# Altium PCB PCB_mezzanine_clock_template.PcbDoc
Units mm, origin at the board's own origin, x right, y up, seen from the top; angles counter-clockwise.
Board outline 43 x 80 mm, 4 copper layers (Component Side, Ground Plane, Power Plane, Solder Side), stack 1.013 mm thick; 81 components, 72 nets, 285 pads, 661 vias.
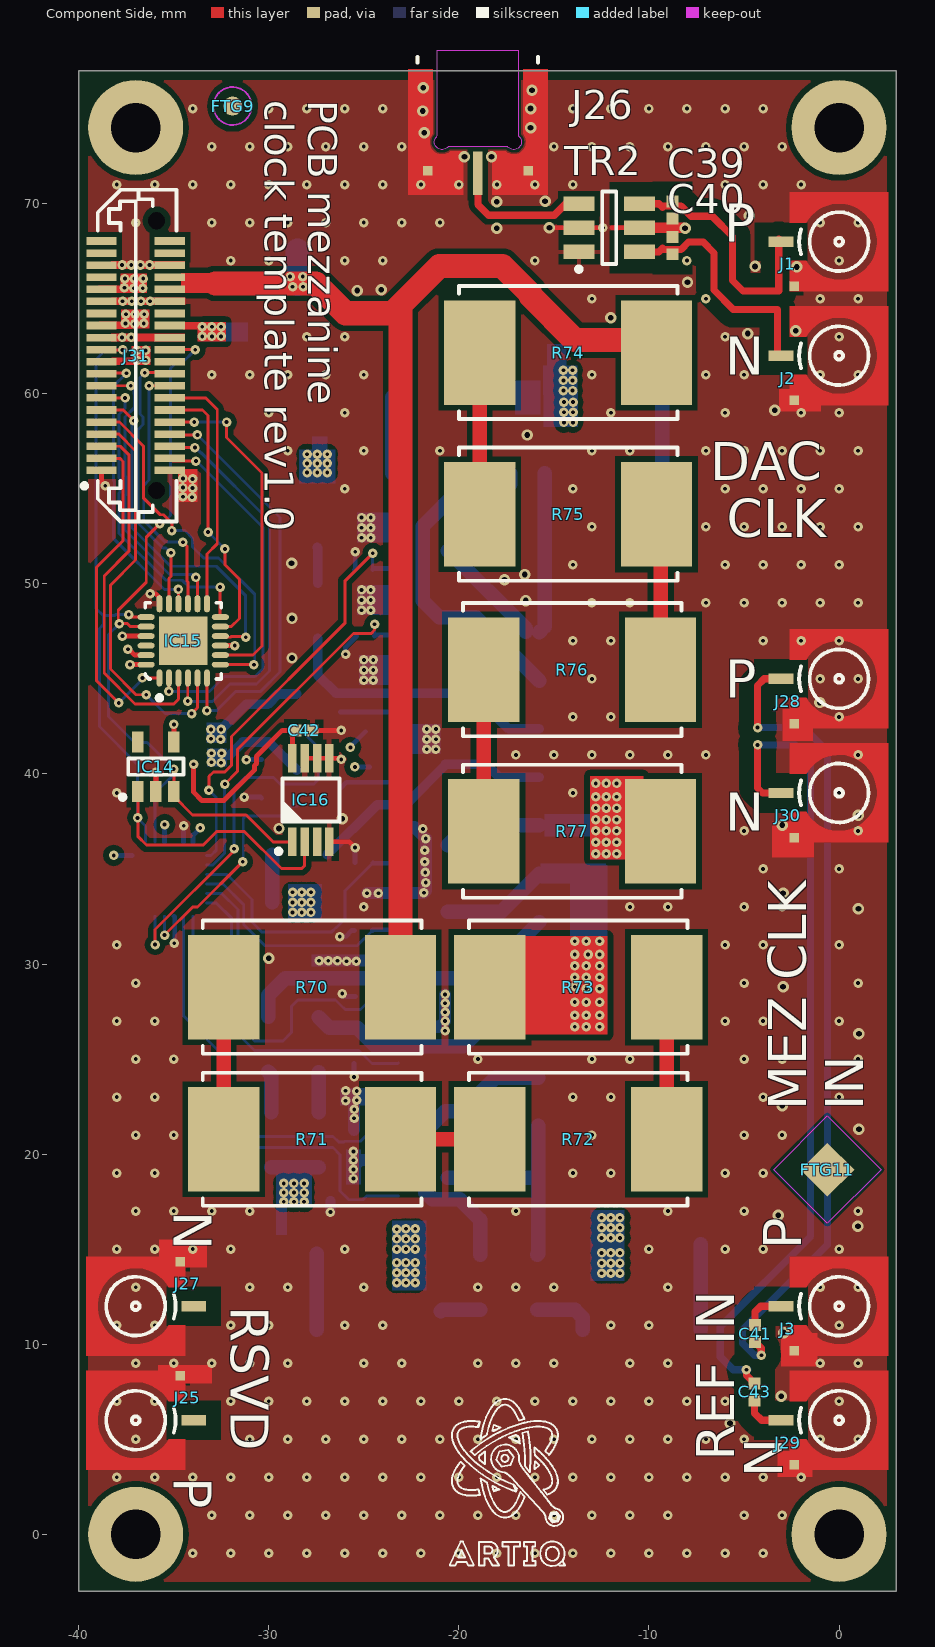
[diagram p0: Component Side view]
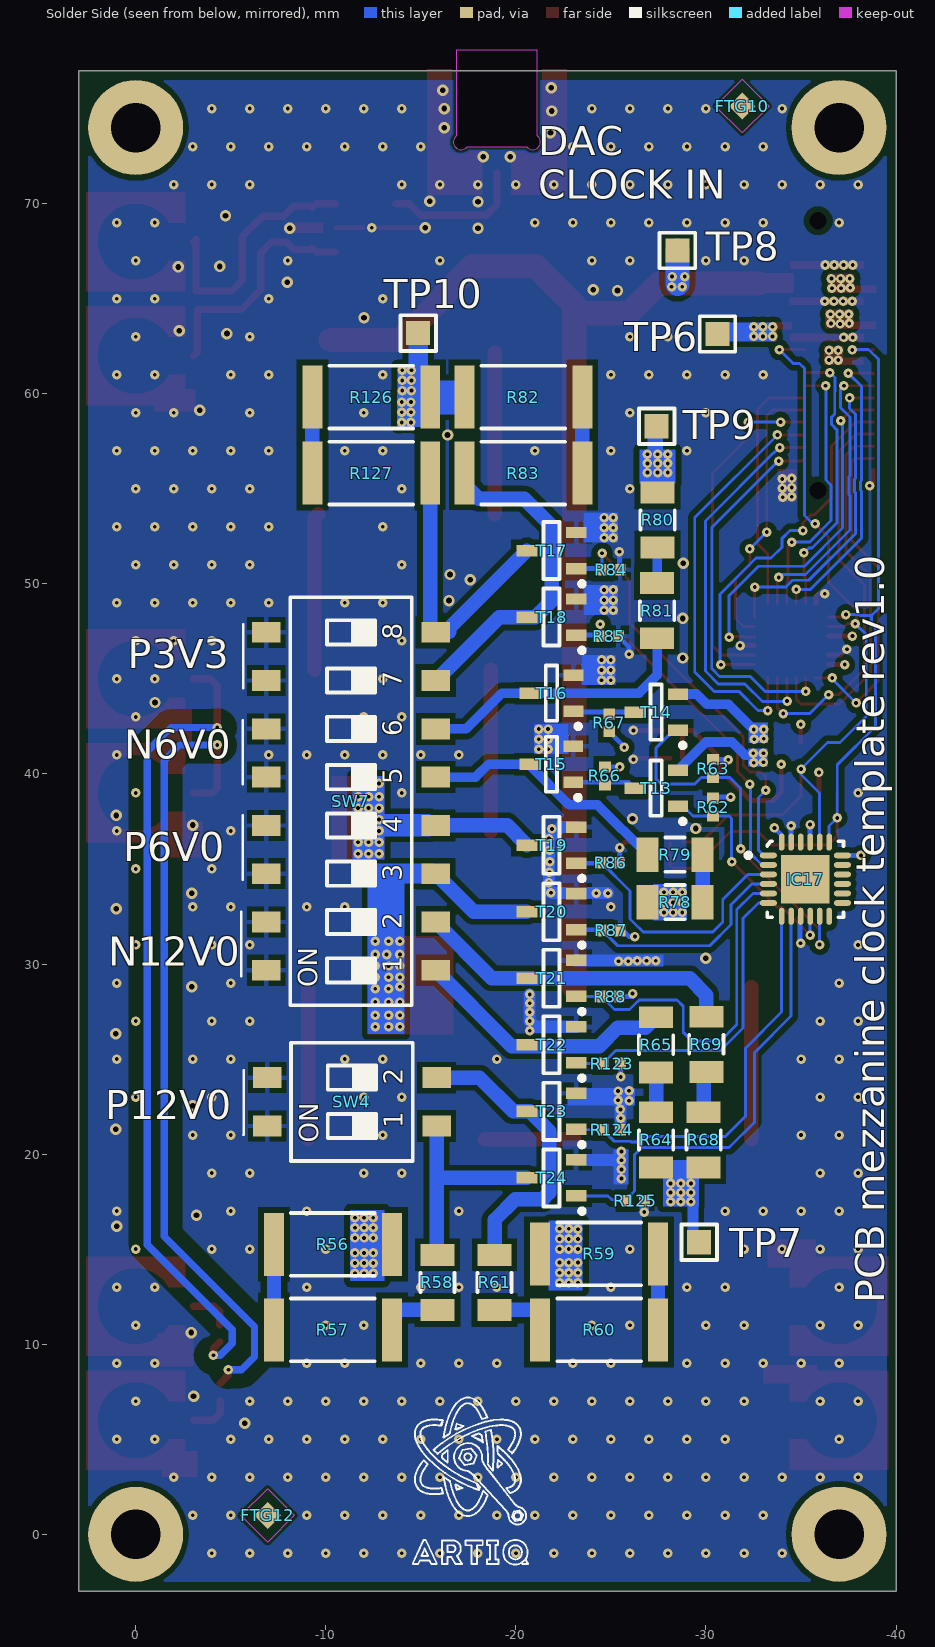
[diagram p1: Solder Side view, seen from below]
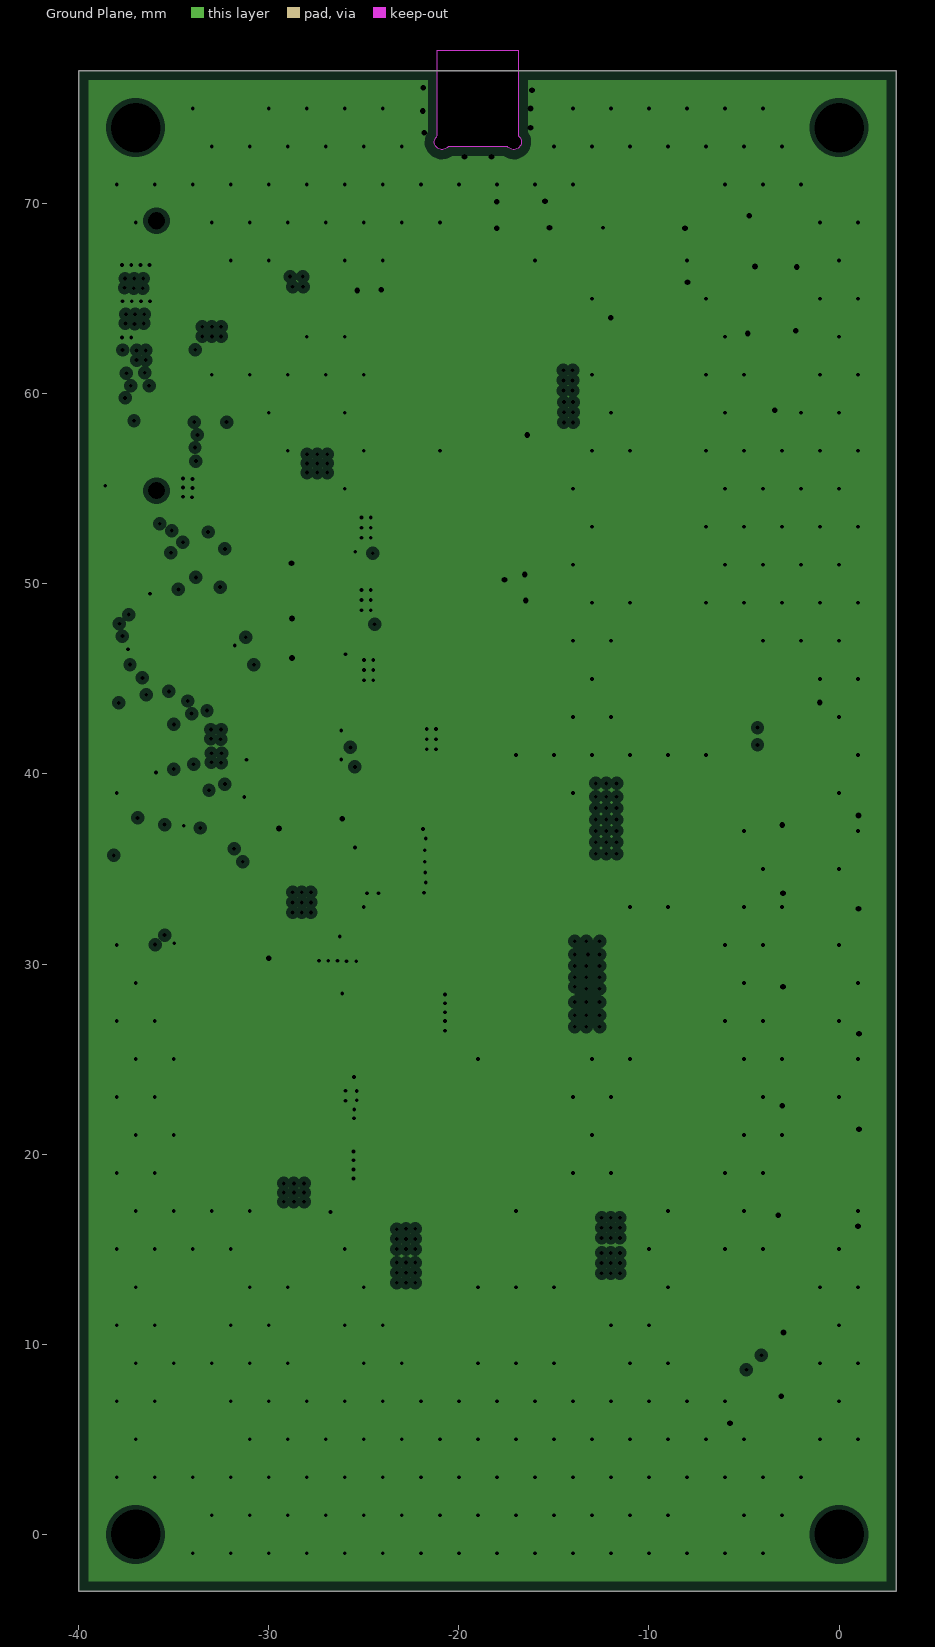
[diagram p2: Ground Plane, clearances drawn from the general rule]
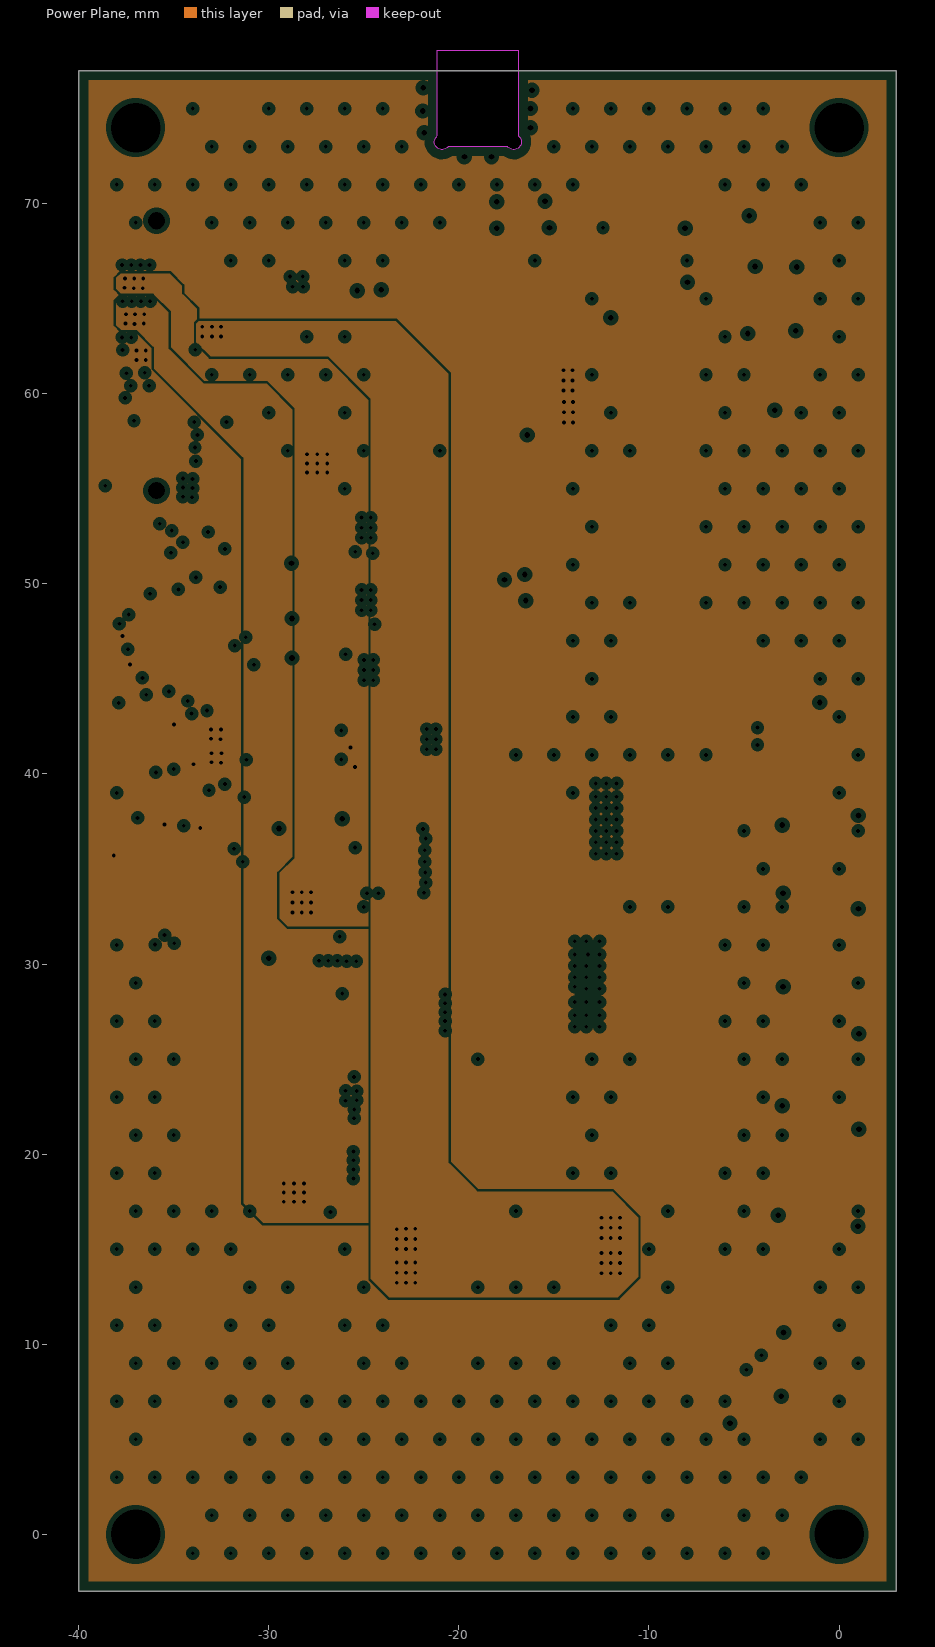
[diagram p3: Power Plane, clearances drawn from the general rule]
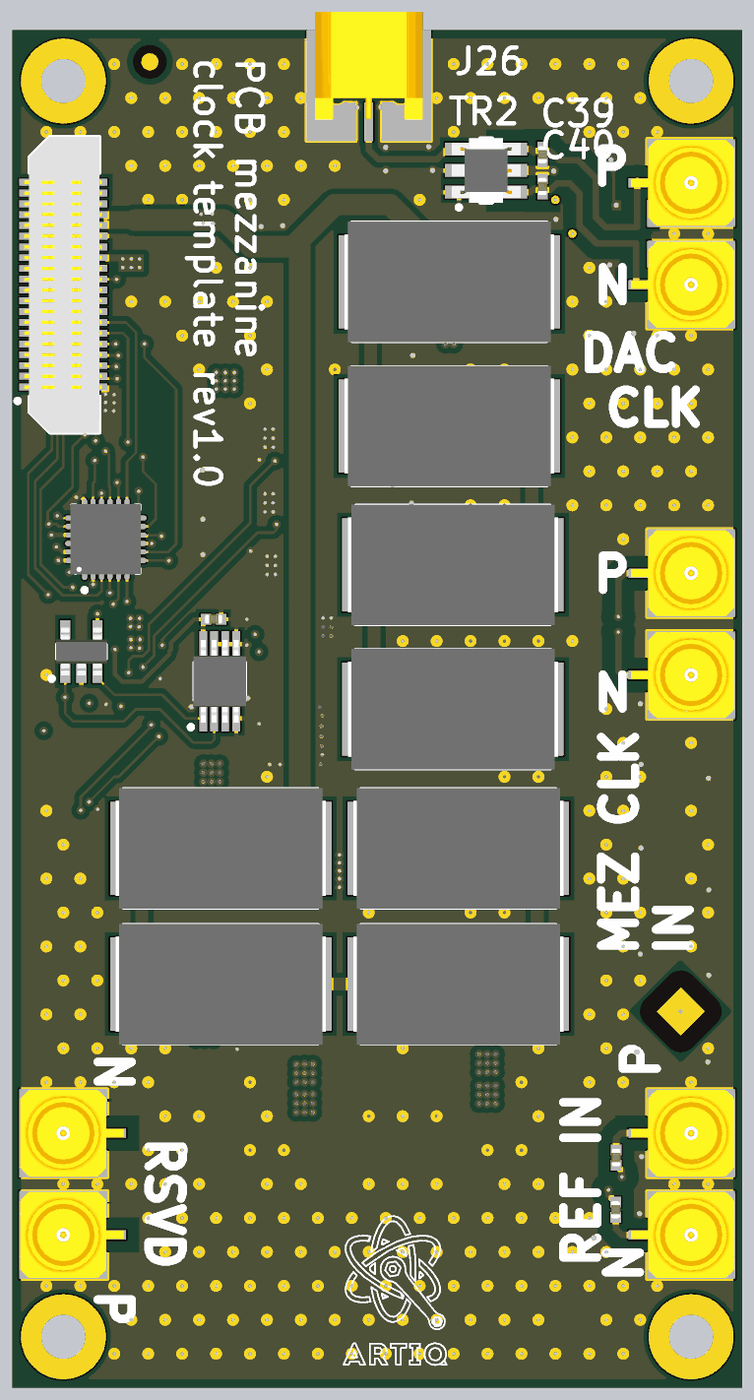
[diagram p4: 3D render of the assembled board from above, using the file's embedded part models]
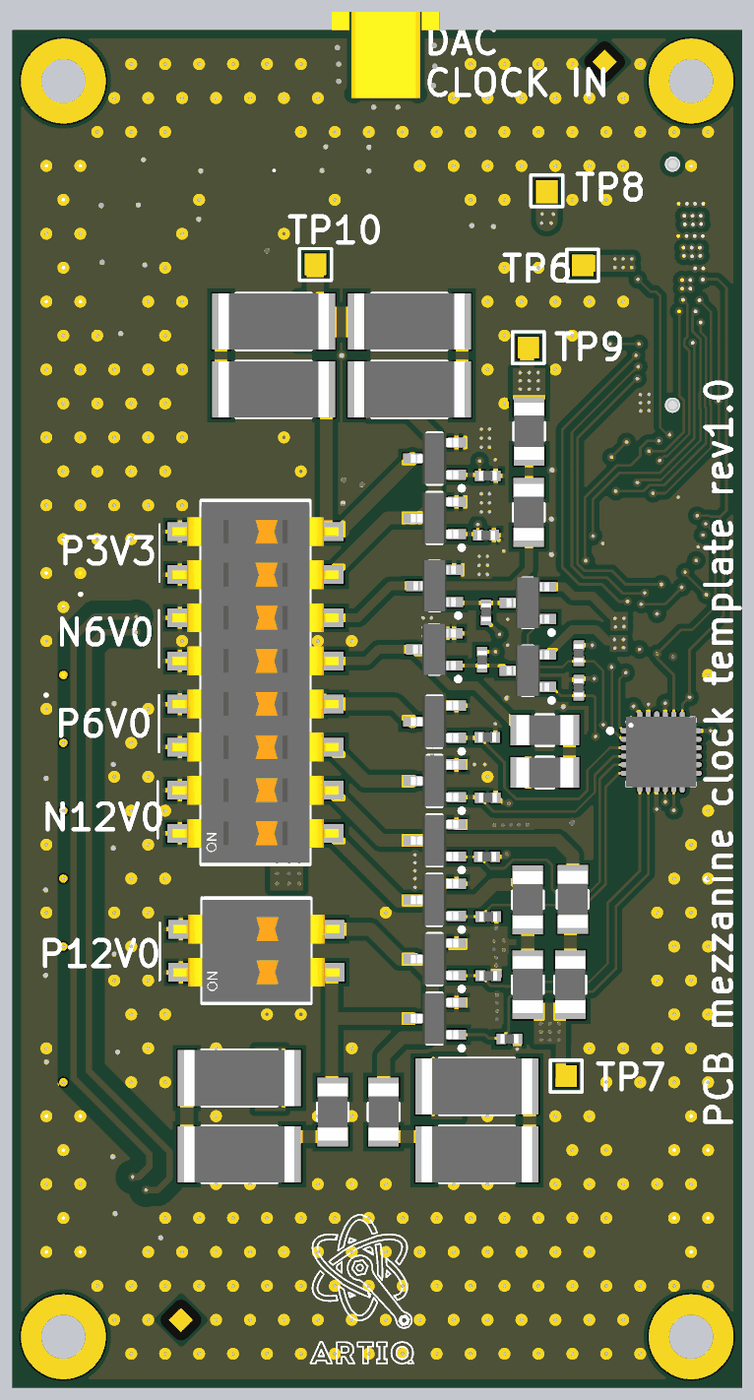
[diagram p5: 3D render of the assembled board from below, using the file's embedded part models]

## Layer stack, top to bottom
Top Solder: solder mask 0.0102, Solder Resist, Dk 3.5
Component Side: signal copper 0.035
Dielectric 1: core 0.2605, FR-4, Dk 4.8
Ground Plane: plane copper 0.035, net GND
Dielectric 3: prepreg 0.352, Dk 4.2
Power Plane: plane copper 0.035, net (Multiple Nets)
Dielectric 4: core 0.2605, Dk 4.2
Solder Side: signal copper 0.035
Bottom Solder: solder mask 0.0102, Solder Resist, Dk 3.5

## Board outline
-40,-3 -40,77 3,77 3,-3

## Design rules (kind name [scope] priority, off if disabled: settings)
Clearance Clearance_1 [(InDifferentialPairClass('All Differential Pairs'))] p1 off: gap=0.762
Clearance [All] p2: gap=0.152 except(0.3: Arc-Poly Track-Poly SMDPad-Poly THPad-Poly Via-Poly Fill-Poly Poly-Poly)
DiffPairsRouting [All] p1: maxlimit=0.254 minlimit=0.254 mostfreqgap=0.254 toplayer_minwidth=0.381 toplayer_maxwidth=0.381 toplayer_prefwidth=0.381 bottomlayer_minwidth=0.381 bottomlayer_maxwidth=0.381 bottomlayer_prefwidth=0.381 maxuncoupledlength=12.7
HoleSize [All] p1: absolutevalues=TRUE maxlimit=3 minlimit=0.025 maxpercent=80.000 minpercent=20.000
PlaneClearance [All] p1: clearance=0.254
PlaneConnect PlaneConnect_pad [InPadClass('All Pads')] p1: planeconnectstyle=Relief reliefexpansion=0.508 reliefentries=4 reliefconductorwidth=0.254 reliefairgap=0.254
PlaneConnect [All] p2: planeconnectstyle=Direct reliefexpansion=0.508 reliefentries=4 reliefconductorwidth=0.254 reliefairgap=0.254
PolygonConnect PolygonConnect_1 [isPad] p1: connectstyle=Relief reliefconductorwidth=0.254 reliefentries=4 polygonreliefangle="90 Angle" airgapwidth=0.254
PolygonConnect [All] p2: connectstyle=Direct reliefconductorwidth=0.254 reliefentries=4 polygonreliefangle="45 Angle" airgapwidth=0.254
RoomDefinition PCB_mezzanine_clock_template [InComponentClass('PCB_mezzanine_clock_template')] p1 off: confinementstyle=ConfineIn formatcopy=TRUE lockcomponents=FALSE outline 4,-1 23,-1 23,10.5 4,10.5
RoutingVias [All] p1: holewidth=0.711 width=0.5 viastyle="Through Hole" minholewidth=0.2 minwidth=0.5 maxholewidth=0.2 maxwidth=1.27
SilkToSolderMaskClearance SilkscreenOverComponentPads [IsPad] p1: minsilkscreentomaskgap=0.254 clearancetoexposedcopper=TRUE
SolderMaskExpansion [All] p1: expansion=0.102
Width [All] p1: maxlimit=2.54 minlimit=0.127 preferedwidth=0.152
25 further rules are at their usual default settings.

## Classes and differential pairs
differential pair RESERVED: +RESERVED_P -RESERVED_N
differential pair REF_LO_OUT: +REF_LO_OUT_P -REF_LO_OUT_N
differential pair REF_CLK_IN: +REF_CLK_IN_P -REF_CLK_IN_N
differential pair DAC_CLK_OUT: +DAC_CLK_OUT_P -DAC_CLK_OUT_N

## Components (designator, comment, footprint, x,y, rotation, side; value= is the part's Value field where it differs from the comment)
C39 "Undefined" CAPC1005X55N -8.761,69.667 r270 top
C40 "Undefined" CAPC1005X55N -8.761,67.787 r270 top
C41 "100nF" CAPC1005X55N -4.417,10.561 r270 top
C42 "100nF" CAPC1005X55N -28.141,42.286 r180 top
C43 "100nF" CAPC1005X55N -4.443,7.488 r90 top
FTG9 "Use only in PCB" FIDUCIAL_TOP_C100-200 -31.902,75.133 r90 top
FTG10 "Use only in PCB" FIDUCIAL_TOP_S100-200 -31.902,75.133 r90 bottom
FTG11 "Use only in PCB" FIDUCIAL_TOP_S200-400 -0.61,19.177 r0 top
FTG12 "Use only in PCB" FIDUCIAL_TOP_S100-200 -6.934,0.991 r90 bottom
IC14 "24AA02E48T-I/OT" SOT95P280X145-5N -35.939,40.381 r90 top
IC15 "TCA9539RTWR" QFN50P400X400X80-25N-S255 -34.5,47 r90 top
IC16 "LM75AIMM/NOPB" SOP65P490X109-8N -27.785,38.628 r90 top
IC17 "TCA9539RTWR" QFN50P400X400X80-25N-S255 -35.227,34.462 r180 bottom
J1 "SMP" MOLEX_85305-0232 0,68 r90 top locked
J2 "SMP" MOLEX_85305-0232 0,62 r90 top locked
J3 "SMP" MOLEX_85305-0232 0,12 r90 top locked
J25 "SMP" MOLEX_85305-0232 -37,6 r270 top locked
J26 "SMP" MOLEX_73415-3591 -19,73 r270 top locked
J27 "SMP" MOLEX_85305-0232 -37,12 r270 top locked
J28 "SMP" MOLEX_85305-0232 0,45 r90 top locked
J29 "SMP" MOLEX_85305-0232 0,6 r90 top locked
J30 "SMP" MOLEX_85305-0232 0,39 r90 top locked
J31 "Familly" SAMTEC_LSS-120-02-L-DV-A -37,62 r270 top locked
R56 "56" RESC6331X70N -10.375,15.25 r0 bottom
R57 "56" RESC6331X70N -10.375,10.75 r180 bottom
R58 "8R2" RESC3216X65N -15.875,13.25 r90 bottom
R59 "56" RESC6331X70N -24.375,14.75 r180 bottom
R60 "56" RESC6331X70N -24.375,10.75 r0 bottom
R61 "8R2" RESC3216X65N -18.875,13.25 r90 bottom
R62 "10k" RESC1005X40N -30.375,38.25 r90 bottom
R63 "10k" RESC1005X40N -30.375,40.28 r90 bottom
R64 "120" RESC3216X65N -27.375,20.75 r90 bottom
R65 "120" RESC3216X65N -27.375,25.75 r90 bottom
R66 "10k" RESC1005X40N -24.686,39.898 r90 bottom
R67 "10k" RESC1005X40N -24.915,42.692 r270 bottom
R68 "120" RESC3216X65N -29.875,20.75 r90 bottom
R69 "120" RESC3216X65N -30.02,25.776 r90 bottom
R70 "2" RESM11670X449N -27.72,28.781 r180 top
R71 "2" RESM11670X449N -27.72,20.781 r0 top
R72 "2" RESM11670X449N -13.72,20.781 r0 top
R73 "2" RESM11670X449N -13.72,28.781 r180 top
R74 "2" RESM11670X449N -14.25,62.165 r180 top
R75 "2" RESM11670X449N -14.25,53.665 r0 top
R76 "2" RESM11670X449N -14.038,45.485 r180 top
R77 "2" RESM11670X449N -14.038,36.985 r0 top
R78 "62" RESC3216X65N -28.375,33.25 r180 bottom
R79 "62" RESC3216X65N -28.375,35.75 r0 bottom
R80 "62" RESC3216X65N -27.455,53.36 r270 bottom
R81 "62" RESC3216X65N -27.43,48.585 r270 bottom
R82 "3R3" RESC6331X70N -20.394,59.826 r180 bottom
R83 "3R3" RESC6331X70N -20.394,55.826 r0 bottom
R84 "10k" RESC1005X40N -25.017,50.744 r180 bottom
R85 "10k" RESC1005X40N -24.915,47.239 r180 bottom
R86 "10k" RESC1005X40N -24.991,35.326 r180 bottom
R87 "10k" RESC1005X40N -25.017,31.77 r180 bottom
R88 "10k" RESC1005X40N -24.966,28.29 r180 bottom
R123 "10k" RESC1005X40N -25.042,24.76 r180 bottom
R124 "10k" RESC1005X40N -25.042,21.28 r180 bottom
R125 "10k" RESC1005X40N -26.287,17.546 r180 bottom
R126 "3R3" RESC6331X70N -12.394,59.826 r0 bottom
R127 "3R3" RESC6331X70N -12.394,55.826 r180 bottom
SW4 "Switch" SW_OMRON_A6S-2102-H -11.375,22.75 r0 bottom
SW7 "Switch" SW_OMRON_A6S-8102-H -11.325,38.56 r0 bottom
T13 "IRLML6402PBF" SOT95P237X112-3N -27.375,39.25 r0 bottom
T14 "IRLML6402PBF" SOT95P237X112-3N -27.375,43.25 r0 bottom
T15 "IRLML6402PBF" SOT95P237X112-3N -21.867,40.508 r0 bottom
T16 "IRLML6402PBF" SOT95P237X112-3N -21.875,44.25 r0 bottom
T17 "DMN2020LSN-7" SOT95P285X140-3N -21.875,51.75 r0 bottom
T18 "DMN2020LSN-7" SOT95P285X140-3N -21.875,48.25 r0 bottom
T19 "DMN2020LSN-7" SOT95P285X140-3N -21.875,36.25 r0 bottom
T20 "DMN2020LSN-7" SOT95P285X140-3N -21.875,32.75 r0 bottom
T21 "DMN2020LSN-7" SOT95P285X140-3N -21.875,29.25 r0 bottom
T22 "DMN2020LSN-7" SOT95P285X140-3N -21.875,25.75 r0 bottom
T23 "DMN2020LSN-7" SOT95P285X140-3N -21.875,22.25 r0 bottom
T24 "DMN2020LSN-7" SOT95P285X140-3N -21.875,18.75 r0 bottom
TP6 "Test Point" TPS127 -30.605,63.139 r0 bottom
TP7 "Test Point" TPS127 -29.639,15.362 r90 bottom
TP8 "Test Point" TPS127 -28.496,67.533 r90 bottom
TP9 "Test Point" TPS127 -27.404,58.288 r90 bottom
TP10 "Test Point" TPS127 -14.857,63.19 r90 bottom
TR2 "1:2" XFMR_MINI-CIRCUITS_DB1627 -12.088,68.727 r90 top

## Footprints (in the part's own frame and the unit in brackets; to place one, negate y for a bottom-side part, rotate by r counter-clockwise, add the part's x,y. Pads: shape width x height; smd on the part's side, far side on the other; paste and mask are expansions set on the pad)
CAPC1005X55N [mm] "Chip Capacitor, Body 1.0x0.55mm, IPC Medium Density"
  rect 0.62x0.62 smd: 1(-0.45,0) 2(0.45,0)
  body extent -0.52,-0.27 0.53,0.28, height 0.55
FIDUCIAL_TOP_C100-200 [mm] "Round Fiducial Target, Top Layer, 1.0mm, Top Solder 2.0mm, Keepout =2.0mm"
  round 1 smd paste-0.51 mask+0.5: FTG2(0,0)
  Component Side keep-out circle w0.1: c0,0 r1
FIDUCIAL_TOP_S100-200 [mm] "Square Fiducial Target, Top Layer, 1.0mm, Top Solder 2.0mm, Keepout =2.0mm"
  rect 1x1 smd rot 45 paste-0.51 mask+0.5: 1(0,0)
  Component Side keep-out region: 1.414,0 0,-1.414 -1.414,0 0,1.414
FIDUCIAL_TOP_S200-400 [mm] "Square Fiducial Target, Top Layer, 2.0mm, Top Solder 4.0mm, Keepout =4.0mm"
  rect 2x2 smd rot 45 paste-0.9 mask+1: 1(0,0)
  Component Side keep-out region: -2.839,0.011 -0.011,2.839 2.818,0.011 -0.011,-2.818
MOLEX_73415-3591 [mm] "50 Ohms, SMP Edge Mount PCB Plug, Leg Length 1.27mm"
  rect 2.29x0.51 smd: 1(1.395,0)
  rect 0.5x0.5 smd paste-0.25 mask-0.25: 2(1.27,2.637) 2(1.27,-2.637)
  Component Side region: -4.08,-3.675 -4.08,-2.375 -0.667,-2.375 -0.667,-2.375 -0.379,-2.52 -0.058,-2.509 0.22,-2.345 0.384,-2.068 0.395,-1.746 0.25,-1.458 0.25,-1.458 0.25,-1.458 0.25,-0.76 2.54,-0.76 2.54,-3.675
  Component Side region: -4.08,2.375 -4.08,3.675 2.54,3.675 2.54,0.76 0.25,0.76 0.25,1.458 0.25,1.458 0.395,1.746 0.384,2.068 0.22,2.345 -0.058,2.509 -0.379,2.52 -0.667,2.375 -0.667,2.375 -0.667,2.375
  Keep-Out Layer board cut-out: -5.08,-2.125 -5.08,2.125 -0.56,2.125 -0.41,2.247 -0.22,2.284 -0.034,2.228 0.103,2.091 0.159,1.906 0.122,1.715 0,1.565 0,1.565 0,-1.565 0.122,-1.715 0.159,-1.906 0.103,-2.091 -0.034,-2.228 -0.22,-2.284 -0.41,-2.247 -0.56,-2.125 -0.56,-2.125
  silkscreen extent -4.73,-3.17 -4.43,3.17, body extent -5.08,-3.17 1.27,3.17, height 2.46
MOLEX_85305-0232 [mm] "50 Ohms, SMP Surface Mount Plug, Limited Detent"
  rect 0.54x1.3 smd: 1(0,3.05)
  rect 0.5x0.5 smd paste-0.25 mask-0.25: 2(-2.35,2.35)
  Component Side region: -2.6,-2.6 -2.6,2.6 -1,2.6 -1,1.732 -1.732,1 -2,0 -1.732,-1 -1,-1.732 0,-2 1,-1.732 1.732,-1 2,0 1.732,1 1,1.732 1,1.732 1,2.6 2.6,2.6 2.6,-2.6
  silkscreen extent -1.55,-1.55 1.55,2.1, body extent -2.54,-2.54 2.54,3.54, height 4.1
QFN50P400X400X80-25N-S255 [mm] "QFN, 0.50mm Pitch, Square; 6 Pin X 6 Pin, 4mm X 4mm Body (w/Thermal Tab 2.55 X 2.55 mm), IPC Medium Density"
  oval 0.9x0.3 smd: 1(-1.95,1.25) 2(-1.95,0.75) 3(-1.95,0.25) 4(-1.95,-0.25) 5(-1.95,-0.75) 6(-1.95,-1.25) 13(1.95,-1.25) 14(1.95,-0.75) 15(1.95,-0.25) 16(1.95,0.25) 17(1.95,0.75) 18(1.95,1.25)
  oval 0.3x0.9 smd: 7(-1.25,-1.95) 8(-0.75,-1.95) 9(-0.25,-1.95) 10(0.25,-1.95) 11(0.75,-1.95) 12(1.25,-1.95) 19(1.25,1.95) 20(0.75,1.95) 21(0.25,1.95) 22(-0.25,1.95) 23(-0.75,1.95) 24(-1.25,1.95)
  rect 2.55x2.55 smd: 25(0,0)
  silkscreen extent -3.12,-2 2,2, body extent -2.07,-2.07 2.08,2.08, height 0.8
RESC1005X40N [mm] "Chip Resistor, EIA 0402, Metric 1005, Body 1.0x0.5mm, IPC Medium Density"
  rect 0.58x0.62 smd: 1(-0.47,0) 2(0.47,0)
  body extent -0.52,-0.27 0.53,0.28, height 0.4
RESC3216X65N [mm] "Chip Resistor, EIA 1206, Metric 3216, Body 3.2x1.6mm, IPC Medium Density"
  rect 1.15x1.8 smd: 1(-1.45,0) 2(1.45,0)
  silkscreen extent -0.5,-0.9 0.5,0.9, body extent -1.67,-0.87 1.68,0.88, height 0.65
RESC6331X70N [mm] "Chip Resistor, EIA 2512, Metric 6331, 2-Leads, Body 6.3x3.1mm, IPC Medium Density"
  rect 1.05x3.3 smd: 1(-3.1,0) 2(3.1,0)
  silkscreen extent -2.2,-1.65 2.2,1.65, body extent -3.25,-1.65 3.25,1.65, height 0.7
RESM11670X449N [mm] "Resistor, Molded Body; 11.56mm L X 6.98mm W X 4.49mm H, IPC Medium Density"
  rect 3.75x5.5 smd: 1(-4.65,0) 2(4.65,0)
  silkscreen extent -5.75,-3.5 5.75,3.5, body extent -6.19,-3.55 6.19,3.55, height 4.49
SAMTEC_LSS-120-02-L-DV-A [mm] "40 Contacts, Pitch 0.635mm, Razor Beam LSS Vertical High Speed Hermaphroditic Strip (Lead Style 7.49mm)"
  rect 0.4x1.6 smd: 1(6.032,-1.8) 2(6.032,1.8) 3(5.397,-1.8) 4(5.397,1.8) 5(4.763,-1.8) 6(4.763,1.8) 7(4.127,-1.8) 8(4.127,1.8) 9(3.492,-1.8) 10(3.492,1.8) 11(2.858,-1.8) 12(2.857,1.8) 13(2.223,-1.8) 14(2.222,1.8) 15(1.588,-1.8) 16(1.587,1.8) 17(0.953,-1.8) 18(0.952,1.8) 19(0.318,-1.8) 20(0.317,1.8) 21(-0.317,-1.8) 22(-0.318,1.8) 23(-0.952,-1.8) 24(-0.953,1.8) 25(-1.587,-1.8) 26(-1.588,1.8) 27(-2.222,-1.8) 28(-2.223,1.8) 29(-2.857,-1.8) 30(-2.858,1.8) 31(-3.492,-1.8) 32(-3.492,1.8) 33(-4.127,-1.8) 34(-4.127,1.8) 35(-4.763,-1.8) 36(-4.763,1.8) 37(-5.397,-1.8) 38(-5.397,1.8) 39(-6.032,-1.8) 40(-6.032,1.8)
  round 0.5 hole 0.9 unplated mask+0.2: P1(-7.1,1.1) P2(7.1,1.1)
  silkscreen extent -8.72,-2.82 8.72,2.14, body extent -8.73,-2.31 8.73,2.29, height 7.5
SOP65P490X109-8N [mm] "SOP, 0.65mm pitch; 8 pin,3.00mm W X 3.00mm L X 1.09mm H bodyI, PC Medium Density"
  rect 1.5x0.45 smd: 1(-2.2,0.975) 2(-2.2,0.325) 3(-2.2,-0.325) 4(-2.2,-0.975) 5(2.2,-0.975) 6(2.2,-0.325) 7(2.2,0.325) 8(2.2,0.975)
  silkscreen extent -2.82,-1.5 1.12,1.82, body extent -2.45,-1.55 2.45,1.55, height 1.09
SOT95P237X112-3N [mm] "SOT, 0.95mm, pitch; 3 pin,1.30mm W X 2.92mm L X 1.12mm H body, IPC Medium Density"
  rect 1.05x0.6 smd: 1(-1.15,0.95) 2(-1.15,-0.95) 3(1.15,0)
  silkscreen extent -1.52,-1.45 0.3,1.87, body extent -1.25,-1.5 1.25,1.5, height 1.1
SOT95P280X145-5N [mm] "SOT, 0.95mm pitch; 5 pin, 1.60mm W X 2.90mm L X 1.45mm H body, IPC Medium Density"
  rect 1.1x0.6 smd: 1(-1.3,0.95) 2(-1.3,0) 3(-1.3,-0.95) 4(1.3,-0.95) 5(1.3,0.95)
  silkscreen extent -1.72,-1.45 0.43,1.87, body extent -1.4,-1.5 1.4,1.5, height 1.45
SOT95P285X140-3N [mm] "SOT23, 0.95mm Pitch; 3 Pin, 1.6mm W X 3mm L X 1.4mm H Body, IPC Medium Density"
  rect 1.1x0.6 smd: 1(-1.3,0.95) 2(-1.3,-0.95) 3(1.3,0)
  silkscreen extent -1.72,-1.5 0.43,1.87, body extent -1.4,-1.5 1.4,1.5, height 1.4
SW_OMRON_A6S-2102-H [mm] "Pitch 2.54mm, Body 6.2x6.4mm, 2 Ways SPST Surface-Mounting DIP Switch, OMRON A6S-H"
  rect 1.5x1.1 smd: 1(-4.45,1.27) 2(-4.45,-1.27) 3(4.45,-1.27) 4(4.45,1.27)
  silkscreen extent -3.2,-3.11 3.2,3.11, body extent -4.9,-3.01 4.9,3.01, height 3.97
SW_OMRON_A6S-8102-H [mm] "Pitch 2.54mm, Body 21.5x6.4mm, 8 Ways SPST Surface-Mounting DIP Switch, OMRON A6S-H"
  rect 1.5x1.1 smd: 1(-4.45,8.89) 2(-4.45,6.35) 3(-4.45,3.81) 4(-4.45,1.27) 5(-4.45,-1.27) 6(-4.45,-3.81) 7(-4.45,-6.35) 8(-4.45,-8.89) 9(4.45,-8.89) 10(4.45,-6.35) 11(4.45,-3.81) 12(4.45,-1.27) 13(4.45,1.27) 14(4.45,3.81) 15(4.45,6.35) 16(4.45,8.89)
  silkscreen extent -3.2,-10.73 3.2,10.73, body extent -4.9,-10.63 4.9,10.63, height 3.85
TPS127 [mm] "1.27 x  1.27mm SMD Test Point Area"
  rect 1.27x1.27 smd paste-1.27: 1(0,0)
  silkscreen extent -0.94,-0.94 0.94,0.94
XFMR_MINI-CIRCUITS_DB1627 [mm] "MINI-CIRCUITS RF Transformer, Case DB1627 - Body 4.06X3.81mm"
  rect 0.76x1.65 smd: 1(-1.27,1.59) 2(0,1.59) 3(1.27,1.59) 4(1.27,-1.59) 5(0,-1.59) 6(-1.27,-1.59)
  silkscreen extent -2.3,-0.37 1.91,1.72, body extent -1.9,-2.03 1.91,2.03, height 4.06

## Part data
C39 C40: library part CC0402_NO-VALUE, "Non-polarised capacitor"
C41 C42 C43: library part CC0402_100NF_16V_10%_X5R, "Non-polarised capacitor"
FTG9: library part FIDUCIAL_TARGET_C100-200, "Fiducial Target"
FTG10 FTG12: library part FIDUCIAL_TARGET_S100-200, "Fiducial Target"
FTG11: library part FIDUCIAL_TARGET_S200-400, "Fiducial Target"
IC14: "1.7V-5.5V, 2K I2C Serial EEPROM With EUI-48 Node Identity"
IC15 IC17: "Low-Voltage 16-Bit I2C and SMBus I/O Expander"
IC16: "Digital Temperature Sensor and Thermal Watchdog with Two-Wire Interface"
J1 J2 J3 J25 J27 J28 J29 J30: library part MOLEX_85305-0232
J26: library part MOLEX_73415-3591
J31: "40 Contacts, Pitch 0.635mm, Razor Beam LSS Vertical High Speed Hermaphroditic Strip (Lead Style 7.49mm)"
R56 R57 R59 R60: library part R2512_56R_5%_1W_200PPM, "Resistor - 5%"
R58 R61: library part R1206_8R2_1%_0.25W_200PPM, "Resistor - 1%"
R62 R63 R66 R67 R84 R85 R86 R87 R88 R123 R124 R125: library part R0402_10K_1%_0.0625W_100PPM, "Resistor - 1%"
R64 R65 R68 R69: library part R1206_120R_1%_0.25W_100PPM, "Resistor - 1%"
R70 R71 R72 R73 R74 R75 R76 R77: library part R4527_2R_1%_2W_50PPM, "Resistor - 1%"
R78 R79 R80 R81: library part R1206_62R_1%_0.25W_100PPM, "Resistor - 1%"
R82 R83 R126 R127: library part R2512_3R3_1%_1W_200PPM, "Resistor - 1%"
SW4: library part SW_OMRON_A6S-2102-H, "2 Ways SPST DIP Switch"
SW7: library part SW_OMRON_A6S-8102-H, "8 Ways SPST DIP Switch"
T13 T14 T15 T16: "P-CHANNEL MOSFET WITH ZENER DIODE"
T17 T18 T19 T20 T21 T22 T23 T24: "20V, 6.9A, N-Channel Enhancement Mode MOSFET"
TP6 TP7 TP8 TP9 TP10: library part SMD_PAD_1.27X1.27MM
TR2: library part XFMR_MINI-CIRCUITS_TCM2-43X+, "50 OHMS 10 to 4000 MHz RF Transformer"

## Free pads (board coordinates)
  round 5 hole 2.6: 0(-37,0) 0(-37,74) 0(0,0) 0(0,74)

## Via types
v1: diameter 0.5, hole 0.2, Component Side to Solder Side, 316 vias
v2: diameter 0.5, hole 0.2, Component Side to Solder Side, tented both sides, 298 vias
v3: diameter 0.6, hole 0.3, Component Side to Solder Side, tented both sides, 47 vias

## Nets (pads, with @x,y where several pads share a name; then routed paths per layer and width w, separated by ;. In a path a pad name is that pad's centre, name@x,y a point inside that pad or via, vN(x,y) a via of type N, cw(c..) or ccw(c..) an arc to the next point about the centre after c; other vN are vias at no path point)
DAC_CLK_OUT_N: C40.2 J2.1 TR2.6 | length 12.7
  Component Side w0.381: TR2.6 -9.482,67.457 -9.284,67.656 -9.213,67.584 -8.309,67.584 -7.915,67.978 -7.148,67.978 -6.576,67.406 -6.576,65.45 -5.56,64.434 -3.24,64.434 -3.24,62.191 J2.1
DAC_CLK_OUT_P: C39.1 J1.1 TR2.4 | length 13.5
  Component Side w0.381: TR2.4 -9.482,69.997 -9.284,69.798 -9.213,69.87 -8.309,69.87 -7.775,69.337 -6.678,69.337 -5.611,68.27 -5.611,65.958 -5.052,65.4 -3.173,65.4 -3.173,68.123 J1.1
GND: C39.2 C40.1 C42.1 IC14.2 IC15.9 IC15.18 IC15.23 IC16.4 IC16.5 IC16.6 IC16.7 IC17.9 IC17.23 J1.2 J2.2 J3.2 J25.2 J26.2 J27.2 J28.2 J29.2 J30.2 J31.1 J31.2 J31.23 J31.24 J31.29 J31.30 J31.35 J31.36 R62.2 R63.2 R84.2 R85.2 R86.2 R87.2 R88.2 R123.2 R124.2 R125.2 SW4.3 SW4.4 SW7.9 SW7.10 SW7.11 SW7.12 SW7.13 SW7.14 SW7.15 SW7.16 T15.2 T16.2 T17.2 T18.2 T19.2 T20.2 T21.2 T22.2 T23.2 T24.2 TR2.1 TR2.2 TR2.5 | length 39.6
  Component Side w0.254: J31.1 -38.8,55.383 -38.606,55.189 v2(-38.606,55.163) ; v2(-37.412,46.553) -37.354,46.553 -37.052,46.25 IC15.23 ; v2(-36.243,49.474) -35.939,49.474 -35.786,49.321 -35.786,48.986 IC15.18 ; IC14.2 v2(-35.939,40.076) ; IC15.9 v2(-31.792,46.75) ; IC16.7 IC16.6 IC16.5 -26.251,40.828 v2(-26.185,40.762) ; C42.1 v2(-26.185,42.286) ; IC16.4 -25.763,36.428 v2(-25.461,36.126) ; v3(-15.238,68.727) TR2.2 v2(-12.418,68.727) ; -11.957,68.727 TR2.5
  Solder Side w0.254: v2(-34.977,31.088) -34.948,31.118 -34.948,32.483 IC17.9 ; IC17.23 v2(-34.477,37.27) ; v2(-31.29,38.78) -30.436,38.78 R62.2 ; v2(-31.175,40.75) R63.2 ; v2(-26.261,31.44) -25.956,31.44 -25.626,31.77 R87.2 ; v2(-26.134,28.443) -26.134,28.32 -26.164,28.29 R88.2 ; v2(-25.956,46.299) -25.956,46.667 R85.2 ; v2(-25.512,24.061) R123.2 ; R84.2 -25.448,50.782 v2(-25.448,51.684) ; R86.2 v2(-25.461,36.126)
  Solder Side w0.508: v2(-26.757,16.949) R125.2
  Solder Side w0.635: v2@-25.512,19.299 -25.512,19.362 -25.174,19.7 T24.2 ; R124.2 v2(-25.512,21.889) v2@-25.512,22.867 ; v2(-24.839,33.726) v2(-24.229,33.726) -21.867,33.726 v2(-21.842,33.751) -21.74,33.853 v2(-21.74,34.285) v2(-21.74,36.596) -22.344,37.2 T19.2 ; T22.2 -21.019,26.7 v2(-20.724,26.995) v2(-20.724,27.457) v2(-20.724,27.935) v2(-20.724,28.399)
  other v1: -34,-1 -32,-1 -30,-1 -28,-1 -26,-1 -24,-1 -22,-1 -20,-1 -18,-1 -16,-1 -14,-1 -12,-1 -10,-1 -8,-1 -6,-1 -4,-1 -33,1 -31,1 -29,1 -27,1 -25,1 -23,1 -21,1 -19,1 -17,1 -15,1 -13,1 -11,1 -9,1 -5,1 -3,1 -38,3 -36,3 -34,3 -32,3 -30,3 -28,3 -26,3 -24,3 -22,3 -20,3 -18,3 -16,3 -14,3 -12,3 -10,3 -8,3 -6,3 -4,3 -2,3 -37,5 -31,5 -29,5 -27,5 -25,5 -23,5 -21,5 -19,5 -17,5 -15,5 -13,5 -11,5 -9,5 -7,5 -5,5 -1,5 1,5 -38,7 -36,7 -32,7 -30,7 -28,7 -26,7 -24,7 -22,7 -20,7 -18,7 -16,7 -14,7 -12,7 -10,7 -8,7 -6,7 0,7 -37,9 -35,9 -33,9 -31,9 -29,9 -25,9 -23,9 -19,9 -17,9 -15,9 -11,9 -9,9 -1,9 1,9 -38,11 -36,11 -32,11 -30,11 -26,11 -24,11 -12,11 -10,11 0,11 -37,13 -31,13 -29,13 -25,13 -19,13 -17,13 -15,13 -9,13 -1,13 1,13 -38,15 -36,15 -34,15 -32,15 -26,15 -10,15 -6,15 -4,15 0,15 -37,17 -35,17 -33,17 -31,17 -17,17 -9,17 -5,17 1,17 -38,19 -36,19 -14,19 -12,19 -6,19 -4,19 -37,21 -35,21 -13,21 -5,21 -3,21 -38,23 -36,23 -14,23 -12,23 -4,23 0,23 -37,25 -35,25 -19,25 -13,25 -11,25 -5,25 -3,25 1,25 -38,27 -36,27 -6,27 -4,27 0,27 -37,29 -5,29 1,29 -38,31 -6,31 -4,31 0,31 -25,33 -11,33 -9,33 -5,33 -3,33 -4,35 0,35 -5,37 1,37 -38,39 -14,39 0,39 -17,41 -15,41 -13,41 -11,41 -9,41 -7,41 1,41 -14,43 -12,43 0,43 -13,45 -1,45 1,45 -14,47 -12,47 -4,47 -2,47 0,47 -13,49 -11,49 -7,49 -5,49 -3,49 -1,49 1,49 -14,51 -6,51 -4,51 -2,51 0,51 -13,53 -7,53 -5,53 -3,53 -1,53 1,53 -26,55 -14,55 -6,55 -4,55 -2,55 0,55 -29,57 -25,57 -21,57 -13,57 -11,57 -7,57 -5,57 -3,57 -1,57 1,57 -30,59 -26,59 -12,59 -6,59 -2,59 0,59 -33,61 -31,61 -29,61 -27,61 -25,61 -13,61 -7,61 -5,61 -1,61 1,61 -28,63 -26,63 -6,63 0,63 -13,65 -7,65 -1,65 1,65 -32,67 -30,67 -26,67 -24,67 -16,67 -8,67 0,67 -37,69 -33,69 -31,69 -29,69 -27,69 -25,69 -23,69 -21,69 -1,69 1,69 -38,71 -36,71 -34,71 -32,71 -30,71 -28,71 -26,71 -24,71 -22,71 -20,71 -18,71 -16,71 -14,71 -6,71 -4,71 -2,71 -33,73 -31,73 -29,73 -27,73 -25,73 -23,73 -15,73 -13,73 -11,73 -9,73 -7,73 -5,73 -3,73 -34,75 -30,75 -28,75 -26,75 -24,75 -14,75 -12,75 -10,75 -8,75 -6,75 -4,75
  other v2: -25.55,18.714 -25.55,19.197 -25.55,19.68 -25.55,20.137 -25.499,22.347 -25.956,22.804 -25.372,22.829 -25.372,23.312 -25.956,23.337 -20.724,26.487 -25.906,30.144 -25.398,30.144 -27.353,30.17 -26.871,30.17 -26.388,30.17 -21.765,34.818 -21.791,35.377 -21.791,35.986 -21.892,37.104 -21.689,41.295 -21.207,41.295 -21.689,41.828 -21.207,41.828 -21.689,42.362 -21.207,42.362 -24.991,44.927 -24.509,44.927 -24.991,45.461 -24.509,45.461 -24.991,45.994 -24.509,45.994 -25.118,48.61 -24.636,48.61 -25.118,49.144 -24.636,49.144 -25.118,49.677 -24.636,49.677 -25.118,52.42 -24.636,52.42 -25.118,52.954 -24.636,52.954 -25.118,53.487 -24.636,53.487 -34.034,54.554 -34.516,54.579 -34.008,55.036 -34.516,55.062 -34.008,55.519 -34.516,55.544 -37.717,62.961 -37.234,62.961 -37.691,64.866 -37.209,64.866 -36.726,64.866 -36.243,64.866 -37.717,66.771 -37.234,66.771 -36.751,66.771 -36.269,66.771
  other v3: -5.738,5.837 -3.046,7.259 -2.919,10.612 0.993,16.2 -3.198,16.784 1.044,21.305 -2.995,22.55 1.044,26.334 -2.944,28.798 -29.995,30.297 1.018,32.913 -2.944,33.726 -29.462,37.129 -2.995,37.307 -26.134,37.637 1.018,37.815 -1.014,43.759 -28.776,46.096 -28.776,48.178 -16.482,49.118 -17.6,50.21 -16.533,50.49 -28.801,51.074 -16.406,57.83 -3.376,59.126 -4.798,63.164 -2.284,63.317 -12.012,64.003 -25.347,65.425 -24.077,65.476 -7.973,65.857 -2.233,66.67 -4.417,66.695 -18.006,68.702 -8.1,68.702 -4.722,69.362 -18.006,70.099 -15.466,70.124 -19.708,72.461 -18.286,72.461 -21.816,73.731 -16.228,73.985 -21.892,74.874 -16.228,75.001 -16.152,75.966 -21.867,76.093
MEZZ_IO0: IC15.1 J31.3 | length 17.7
  Component Side w0.152: J31.3 -37.835,56.603 -37.666,56.433 -37.666,52.268 -39.063,50.871 -39.063,44.902 v2(-37.894,43.733) ; v2(-36.646,45.05) IC15.1
  Solder Side w0.152: v2(-37.894,43.733) -36.701,44.927 v2@-36.701,45.105
MEZZ_IO1: IC15.2 J31.4 | length 20
  Component Side w0.152: v2(-35.25,44.34) IC15.2 ; J31.4 -35.056,56.459 v2(-33.83,56.459)
  Solder Side w0.152: v2(-35.25,44.34) -33.122,44.34 -32.332,45.13 -30.715,45.13 -30.304,45.542 -30.304,52.958 -33.805,56.459 v2(-33.83,56.459)
MEZZ_IO2: IC15.3 J31.5 | length 19.5
  Component Side w0.152: J31.5@-38.783,57.221 J31.5 -37.81,57.238 -37.361,56.789 -37.361,51.709 -38.656,50.414 -38.656,45.308 -37.031,43.683 -34.999,43.683 -34.75,43.931 IC15.3
MEZZ_IO3: IC15.4 J31.6 | length 21
  Component Side w0.152: J31.6 -35.133,57.17 v2(-33.881,57.17) ; v2(-34.262,43.835) -34.262,45.038 IC15.4
  Solder Side w0.152: v2(-34.262,43.835) -34.262,43.784 -34.237,43.81 -32.967,43.81 -32.04,44.737 -30.643,44.737 -29.97,45.41 -29.97,53.308 -33.552,56.891 -33.576,56.891 -33.881,57.195 v2(-33.881,57.17)
MEZZ_IO4: IC15.5 J31.7 | length 21.4
  Component Side w0.152: J31.7 -37.886,57.873 -37.005,56.992 -37.005,51.252 -38.334,49.923 -38.334,45.519 -36.98,44.165 v2(-36.447,44.165) ; v2(-34.059,43.175) -33.75,43.484 IC15.5
  Solder Side w0.152: v2(-36.447,44.165) -35.456,43.175 v2(-34.059,43.175)
MEZZ_IO5: IC15.6 J31.8 | length 22.1
  Component Side w0.152: J31.8 -35.158,57.83 v2(-33.754,57.83) ; v2(-33.25,43.331) IC15.6
  Solder Side w0.152: v2(-33.754,57.83) -29.411,53.487 -29.411,45.359 -30.425,44.345 -31.724,44.345 -32.738,43.331 v2(-33.25,43.331)
MEZZ_IO6: IC15.7 J31.9 | length 19.4
  Component Side w0.152: J31.9 -37.86,58.508 -36.599,57.246 -36.599,54.528 -35.706,53.636 -35.538,53.636 -35.1,53.199 v2(-35.1,52.801) ; IC15.7 -30.792,45.75 v2(-30.782,45.74)
  Solder Side w0.152: v2(-35.1,52.801) -34.415,52.801 -34.008,52.395 -34.008,51.938 -33.424,51.353 -32.637,51.353 -30.736,49.452 -30.736,45.787 v2(-30.782,45.74)
MEZZ_IO7: IC15.8 J31.10 | length 17.9
  Component Side w0.152: J31.10 v2(-33.923,58.508) ; IC15.8 -30.831,46.25 -30.351,46.731 -30.351,55.824 -32.222,57.695 v2(-32.222,58.508)
  Solder Side w0.152: v2(-33.923,58.508) v2(-32.222,58.508)
MEZZ_IO8: IC15.10 J31.11 | length 18.7
  Component Side w0.152: J31.11 -37.657,59.143 v2(-37.09,58.575) ; IC15.10 -32.488,47.188 -32.031,47.188 -31.991,47.229 -31.255,47.229 v2(-31.214,47.188)
  Solder Side w0.152: v2(-37.09,58.575) -37.188,58.477 -37.188,52.933 -35.177,50.922 -32.764,50.922 -31.214,49.372 v2(-31.214,47.188)
MEZZ_IO9: IC15.11 J31.12 | length 14.7
  Component Side w0.152: J31.12 -33.492,59.143 -33.195,58.846 v2(-33.195,52.725) ; IC15.11 -31.973,47.75 -31.544,48.178 -31.544,50.236 -32.306,50.998 v2(-32.306,51.836)
  Solder Side w0.152: v2(-33.195,52.725) v2(-32.306,51.836)
MEZZ_IO10: IC15.12 J31.13 | length 16.6
  Component Side w0.152: J31.13 v2(-37.556,59.778) ; v2(-32.56,49.829) -32.56,48.26 IC15.12
  Solder Side w0.152: v2(-37.556,59.778) -37.556,59.218 -37.873,58.9 -37.873,55.564 -37.822,55.513 -37.822,54.814 -37.873,54.762 -37.873,52.653 -35.406,50.186 -34.552,50.186 -34.195,49.829 v2(-32.56,49.829)
MEZZ_IO11: IC15.13 J31.14 | length 13.2
  Component Side w0.152: J31.14 -33.314,59.778 -32.713,59.177 -32.713,52.106 -33.25,51.569 IC15.13
MEZZ_IO12: IC15.14 J31.15 | length 15.6
  Component Side w0.152: J31.15 -38.791,60.421 v2(-37.259,60.421) ; v2(-33.83,50.337) -33.75,50.257 IC15.14
  Solder Side w0.152: v2(-37.259,60.421) -37.086,60.247 -37.086,59.984 -37.077,59.976 -37.077,59.265 -37.569,58.774 -37.569,55.691 -37.517,55.64 -37.517,54.687 -37.569,54.636 -37.569,52.831 -35.229,50.491 -33.984,50.491 v2(-33.83,50.337)
MEZZ_IO13: IC15.15 J31.16 | length 14.2
  Component Side w0.152: v2(-36.294,60.421) -35.209,60.421 J31.16 ; v2(-34.516,52.192) -34.309,51.984 -34.309,50.139 -34.25,50.08 IC15.15
  Solder Side w0.152: v2(-36.294,60.421) ccw(c-36.264,60.391) -36.307,60.391 -36.307,55.453 -36.579,55.181 -36.579,53.323 -35.447,52.192 v2(-34.516,52.192)
MEZZ_IO14: IC15.16 J31.17 | length 15.6
  Component Side w0.152: J31.17 -38.766,61.082 v2(-37.488,61.082) ; IC15.16 v2(-34.75,49.708)
  Solder Side w0.152: v2(-37.488,61.082) -38.178,60.391 -38.178,55.438 -38.127,55.387 -38.127,54.94 -38.178,54.889 -38.178,52.399 -35.487,49.708 v2(-34.75,49.708)
MEZZ_IO15: IC15.17 J31.18 | length 14.7
  Component Side w0.152: v2(-36.523,61.107) -35.26,61.107 J31.18 ; IC15.17 -35.25,50.289 -35.151,50.388 v2(-35.151,51.633)
  Solder Side w0.152: v2(-36.523,61.107) -36.781,60.849 -36.781,60.111 -36.772,60.102 -36.772,58.934 -36.611,58.774 -36.611,58.377 -36.883,58.105 -36.883,53.197 -35.573,51.887 -35.405,51.887 v2(-35.151,51.633)
N6V0A: J31.31 R66.2 R67.2 R78.1 R80.1 TP9.1 | length 1.9
  Solder Side w0.254: v2(-25.702,41.397) -25.702,41.435 R67.2 ; v2(-25.468,40.368) R66.2
  other v2: -28.75,32.71 -28.268,32.71 -27.785,32.71 -28.75,33.243 -28.268,33.243 -27.785,33.243 -28.75,33.777 -28.268,33.777 -27.785,33.777 -27.988,55.849 -27.455,55.849 -26.922,55.849 -27.988,56.332 -27.455,56.332 -26.922,56.332 -27.988,56.814 -27.455,56.814 -26.922,56.814 -37.107,65.552 -36.624,65.552 -37.59,65.577 -37.564,66.06 -37.082,66.06 -36.599,66.06
N12V0A: J31.25 R64.1 R68.1 TP7.1 | length 2.5
  Solder Side w0.762: R68.1 R64.1
  other v2: -29.208,17.495 -28.674,17.495 -28.141,17.495 -29.208,17.978 -28.674,17.978 -28.141,17.978 -29.208,18.46 -28.674,18.46 -28.141,18.46 -37.056,63.672 -37.539,63.698 -36.574,63.698 -37.513,64.18 -37.031,64.18 -36.548,64.18
NetJ26_1: J26.1 TR2.3 | length 7.5
  Component Side w0.381: J26.1 -19,69.949 -18.438,69.387 -14.984,69.387 -14.374,69.997 TR2.3
NetR56_2: R56.2 R57.1 | length 4.5
  Solder Side w0.762: R57.1 R56.2
NetR57_2: R57.2 R58.1 | length 3.2
  Solder Side w0.762: R58.1 -13.886,11.8 -13.475,11.389 R57.2
NetR58_2: R58.2 SW4.1 T24.3 | length 11.6
  Solder Side w0.762: T24.3 -15.968,18.75 -15.825,18.892 ; R58.2 -15.825,14.75 -15.825,18.892 ; SW4.1 -15.825,18.892
NetR59_2: R59.2 R60.1 | length 4
  Solder Side w0.762: R60.1 R59.2
NetR60_2: R60.2 R61.1 | length 2.1
  Solder Side w0.762: R60.2@-20.953,11.729 -20.882,11.8 R61.1
NetR61_2: R61.2 SW4.2 T23.3 | length 15.7
  Solder Side w0.762: R61.2 -18.875,16.535 -19.962,17.622 -21.41,17.622 -21.765,17.978 -21.765,21.204 -20.719,22.25 T23.3 -19.856,22.25 -18.086,24.02 SW4.2
NetR64_2: R64.2 R65.1 | length 2.1
  Solder Side w0.762: R64.2 R65.1
NetR65_2: R65.2 SW7.1 T22.3 | length 13.9
  Solder Side w0.762: R65.2 -26.815,26.639 -25.347,26.639 -24.382,25.674 -19.771,25.674 SW7.1
NetR66_1: R66.1 T13.3 T15.1 | length 3.3
  Solder Side w0.254: T13.3 -25.917,39.558 T15.1
NetR67_1: R67.1 T14.3 T16.1 | length 3.2
  Solder Side w0.254: T14.3 -23.075,43.25 T16.1
NetR68_2: R68.2 R69.1 | length 2.2
  Solder Side w0.762: R69.1 -29.875,24.18 R68.2
NetR69_2: R69.2 SW7.2 T21.3 | length 17
  Solder Side w0.762: R69.2 -30.02,28.366 -29.137,29.25 T21.3 -18.735,29.25 SW7.2
NetR70_2: R70.2 R71.1 | length 8
  Component Side w0.762: R71.1 R70.2
NetR71_2: R71.2 R72.1 | length 4.7
  Component Side w0.762: R71.2 R72.1
NetR72_2: R72.2 R73.1 | length 8
  Component Side w0.762: R72.2 R73.1
NetR73_2: R73.2 SW7.3 T20.3 | length 5.6
  Solder Side w0.762: T20.3 -17.775,32.75 SW7.3
  other v2: -13.9,26.7 -13.3,26.7 -12.6,26.7 -13.9,27.3 -13.3,27.3 -12.6,27.3 -13.9,28 -13.3,28 -12.6,28 -13.3,28.7 -12.6,28.7 -13.9,28.8 -13.9,29.3 -13.3,29.3 -12.6,29.3 -13.9,29.9 -13.3,29.9 -12.6,29.9 -13.9,30.5 -13.2,30.5 -12.6,30.5 -13.9,31.2 -13.3,31.2 -12.6,31.2
NetR74_2: R74.2 R75.1 | length 8.5
  Component Side w0.762: R75.1 R74.2
NetR75_2: R75.2 R76.1 | length 8.3
  Component Side w0.762: R75.2 -9.388,53.453 R76.1
NetR76_2: R76.2 R77.1 | length 8.5
  Component Side w0.762: R77.1 R76.2
NetR77_2: R77.2 SW7.4 T19.3 | length 5.2
  Solder Side w0.762: T19.3 -19.535,37.29 SW7.4
  other v2: -12.8,35.8 -12.25,35.8 -11.7,35.8 -12.8,36.4 -12.25,36.4 -11.7,36.4 -12.8,37 -12.25,37 -11.7,37 -12.8,37.6 -12.25,37.6 -11.7,37.6 -12.8,38.2 -12.25,38.2 -11.7,38.2 -12.8,38.8 -12.25,38.8 -11.7,38.8 -12.8,39.5 -12.25,39.5 -11.7,39.5
NetR78_2: R78.2 R79.1 | length 2.5
  Solder Side w0.762: R78.2 R79.1
NetR79_2: R79.2 SW7.5 T15.3 | length 13.4
  Solder Side w0.508: R79.2 -24.301,38.374 -22.801,38.374 -20.717,40.458 T15.3 -18.565,40.508 -17.887,39.83 SW7.5
NetR80_2: R80.2 R81.1 | length 1.9
  Solder Side w0.508: R80.2 -27.43,51.885 R81.1
NetR81_2: R81.2 SW7.6 T16.3 | length 14.8
  Solder Side w0.508: R81.2 -27.43,45.207 -26.473,44.25 T16.3 -19.259,44.25 -17.379,42.37 SW7.6
NetR82_2: R82.2 R83.1 | length 4
  Solder Side w0.762: R83.1 R82.2
NetR83_2: R83.2 SW7.7 T18.3 | length 17.9
  Solder Side w0.762: R83.2 -17.294,55.241 -18.057,54.478 -20.445,54.478 -21.892,53.03 -21.892,49.118 -21.024,48.25 T18.3 -19.115,48.25 SW7.7
NetR126_2: R126.2 R127.1 | length 4
  Solder Side w0.762: R127.1 R126.2
NetR127_2: R127.2 SW7.8 T17.3 | length 14.5
  Solder Side w0.762: T17.3 -16.482,47.657 SW7.8@-16.482,47.467 ; SW7.8 -15.494,47.731 R127.2
P3V3: C42.2 IC14.4 IC15.21 IC15.24 IC16.8 IC17.18 IC17.21 IC17.24 J31.19 R82.1 R126.1 T13.2 T14.2 TP10.1 | length 25.9
  Component Side w0.254: v2(-37.703,47.25) IC15.21 ; v2(-37.3,45.75) IC15.24 ; IC14.4 v2(-34.989,42.606) ; v2(-33.957,40.508) -33.957,39.034 -33.526,38.603 -32.357,38.603 -30.757,40.203 -30.757,40.419 -30.646,40.531 -30.646,40.924 -29.284,42.286 C42.2 -28.76,42.116 IC16.8
  Solder Side w0.254: v2(-38.154,35.712) IC17.18 ; IC17.21 v2(-35.477,37.337) ; IC17.24 -33.977,36.779 v2(-33.602,37.155)
  Solder Side w0.508: v2@-32.51,40.99 -32.052,40.99 -31.367,41.676 -30.001,41.676 T13.2 ; v2(-32.51,42.336) -31.189,43.657 -30.046,43.657 -29.503,44.2 T14.2
  other v2: -32.51,40.584 -33.018,40.609 -33.018,41.092 -32.484,41.092 -32.535,41.828 -33.043,41.854 -33.043,42.336 -14.476,58.491 -13.993,58.491 -14.476,59.024 -13.993,59.024 -14.476,59.558 -13.993,59.558 -14.501,60.167 -14.018,60.167 -14.501,60.701 -14.018,60.701 -14.501,61.234 -14.018,61.234 -36.955,61.767 -36.472,61.767 -36.955,62.275 -36.472,62.275
P6V0A: J31.32 J31.34 R70.1 R74.1 TP8.1 | length 63.5
  Component Side w1.27: -32.8,65.8 -27.525,65.8 -25.956,64.231 -23.508,64.231 -23.07,64.67 ; R70.1 -23.07,64.67 ; R74.1@-10.251,62.817 -13.899,62.817 -16.237,65.155 -16.237,65.242 -17.716,66.72 -21.019,66.72 -23.07,64.67
  Solder Side w1.27: -28.496,65.781 TP8.1
  other v2: -28.75,65.628 -28.192,65.628 -28.877,66.162 -28.217,66.162
P12V0A: J31.26 R56.1 R59.1 TP6.1
  other v2: -23.264,13.228 -22.781,13.228 -22.299,13.228 -12.494,13.736 -12.012,13.736 -11.529,13.736 -23.264,13.761 -22.781,13.761 -22.299,13.761 -12.494,14.269 -12.012,14.269 -11.529,14.269 -23.264,14.295 -22.781,14.295 -22.299,14.295 -12.494,14.803 -12.012,14.803 -11.529,14.803 -23.264,15.006 -22.781,15.006 -22.299,15.006 -23.264,15.539 -22.781,15.539 -22.299,15.539 -12.494,15.59 -12.012,15.59 -11.529,15.59 -23.264,16.047 -22.781,16.073 -22.299,16.073 -12.494,16.124 -12.012,16.124 -11.529,16.124 -12.494,16.657 -12.012,16.657 -11.529,16.657 -33.5,63.012 -32.992,63.012 -32.51,63.012 -33.5,63.52 -32.992,63.52 -32.51,63.52
REF_CLK_IN_N: C43.1 J29.1 | length 2.2
  Component Side w0.381: C43.1 -4.443,6.37 -4.073,6 J29.1
REF_CLK_IN_P: C41.1 J3.1 | length 2.2
  Component Side w0.381: C41.1 -4.417,11.704 -4.121,12 J3.1
REF_LO_OUT_N: C43.2 J30.1 | length 42.7
  Component Side w0.381: v2(-4.874,8.656) -4.874,8.369 C43.2 ; v2(-4.29,41.524) -4.29,39.263 -4.027,39 J30.1
  Solder Side w0.381: v2@-4.798,8.656 v2(-4.874,8.656) -5.56,8.656 -6.246,9.342 -6.246,10.917 -1.496,15.666 -1.496,40.711 -2.309,41.524 v2(-4.29,41.524)
REF_LO_OUT_P: C41.2 J28.1 | length 42.9
  Component Side w0.381: C41.2 -4.087,9.781 v2(-4.087,9.418) ; v2(-4.29,42.438) -4.29,44.648 -3.938,45 J28.1
  Solder Side w0.381: v2(-4.29,42.438) -1.852,42.438 -0.607,41.193 -0.607,15.235 -5.078,10.764 -5.078,10.053 -4.443,9.418 v2(-4.087,9.418)
RESERVED_N: J27.1
RESERVED_P: J25.1
SCL: IC14.1 IC15.19 IC16.2 IC17.19 J31.21 | length 45.5
  Component Side w0.152: J31.21 -38.783,62.301 v2(-37.691,62.301) ; v2(-37.361,48.382) -37.361,48.331 -37.28,48.25 IC15.19 ; IC14.1 -36.889,36.723 -36.431,36.266 -33.449,36.266 -32.738,36.977 -31.29,36.977 -29.335,35.021 -28.268,35.021 -28.11,35.179 IC16.2
  Solder Side w0.152: v2(-37.691,62.301) -37.666,62.326 -38.555,62.326 -39.084,61.797 -39.084,48.708 -38.707,48.331 ; v2(-37.361,48.382) -38.053,48.382 -38.104,48.331 -38.707,48.331 ; IC17.19 -36.477,37.262 v2(-36.904,37.688) -36.904,40.482 -38.91,42.489 -38.91,47.645 -38.707,47.848 -38.707,48.331
SDA: IC14.3 IC15.20 IC16.1 IC17.20 J31.22 | length 41.8
  Component Side w0.152: v2@-37.92,48.001 -37.92,48.61 -36.447,50.083 -36.447,52.446 v2(-35.736,53.157) ; v2(-37.855,47.902) -37.437,47.902 -37.285,47.75 IC15.20 ; J31.22 v2(-33.864,62.318) ; v2(-34.999,40.254) -34.989,40.243 IC14.3 -34.989,38.821 -34.008,37.841 -31.189,37.841 -29.776,36.428 IC16.1
  Solder Side w0.152: v2(-37.855,47.902) -38.428,47.33 -38.428,43.022 -37.056,41.651 -36.396,41.651 v2(-34.999,40.254) -34.999,39.974 -35.977,38.996 IC17.20 ; v2(-35.736,53.157) -35.736,53.029 -35.177,53.589 -35.177,61.336 -34.923,61.59 -34.592,61.59 v2(-33.864,62.318)
SW1: IC17.1 R84.1 T17.1 | length 22.6
  Component Side w0.152: v2(-33.145,39.136) -33.145,39.873 -32.912,40.105 -32.311,40.105 -31.959,40.458 -31.959,41.973 -25.982,47.95 -25.982,50.16 v2(-24.534,51.607)
  Solder Side w0.152: IC17.1 -33.038,35.712 -32.764,35.986 -32.764,38.755 v2(-33.145,39.136) ; R84.1 -24.534,50.756 v2(-24.534,51.607)
  Solder Side w0.254: R84.1@-24.534,50.756 -24.491,50.8 T17.1
SW2: IC17.2 R85.1 T18.1 | length 19
  Component Side w0.152: v2(-32.306,39.466) -31.654,40.119 -31.654,41.278 -25.541,47.391 -24.61,47.391 -24.432,47.569 v2(-24.432,47.874)
  Solder Side w0.152: IC17.2 -32.942,35.212 -32.332,35.823 -32.332,39.441 v2(-32.306,39.466) ; R85.1 -24.432,47.251 v2(-24.432,47.874)
  Solder Side w0.254: R85.1@-24.432,47.251 -24.384,47.3 T18.1
SW3: IC17.3 R86.1 T19.1 | length 14.4
  Solder Side w0.152: IC17.3 -32.201,34.712 -30.884,33.396 -30.884,32.202 -30.376,31.694 -26.684,31.694 -26.459,31.918 -26.443,31.918 -26,32.361 -26,33.847 R86.1
  Solder Side w0.254: R86.1 -24.495,35.3 T19.1
SW4: IC17.4 R87.1 T20.1 | length 12.4
  Solder Side w0.152: IC17.4 -32.412,34.212 -31.316,33.116 -31.316,32.075 -30.202,30.961 -25.355,30.961 R87.1
  Solder Side w0.254: R87.1 -24.517,31.8 T20.1
SW5: IC17.5 R88.1 T21.1 | length 19.1
  Solder Side w0.152: IC17.5 -32.471,33.712 -31.621,32.862 -31.621,26.817 -30.757,25.953 -29.258,25.953 -28.801,26.411 -28.801,27.782 -28.471,28.112 -26.49,28.112 -26.247,27.869 -25.982,27.604 -25.182,27.604 R88.1 -23.185,28.29 T21.1
SW6: IC17.6 R123.1 T22.1 | length 17
  Solder Side w0.152: IC17.6 -32.758,33.212 -31.951,32.405 -31.951,26.639 -30.757,25.445 -25.258,25.445 R123.1 -23.215,24.76 T22.1
SW7: IC17.7 R124.1 T23.1 | length 21
  Solder Side w0.152: IC17.7 -33.977,27.472 -32.078,25.572 -32.078,21.991 -31.011,20.924 -26.617,20.924 -26.337,20.645 -26.054,20.645 -26.023,20.675 -25.176,20.675 R124.1 -23.195,21.28 T23.1
SW8: IC17.8 R125.1 T24.1 | length 23.9
  Solder Side w0.152: IC17.8 -34.477,27.261 -32.56,25.344 -32.56,21.686 -31.214,20.34 -26.617,20.34 -26.247,19.969 -26.247,18.065 -25.779,17.597 -25.055,17.597 -24.852,17.8 T24.1
SW9: IC17.10 R62.1 T13.1 | length 12.1
  Component Side w0.152: v2(-35.477,31.523) -34,33 -33.743,33 v2(-31.367,35.377)
  Solder Side w0.152: v2(-35.477,31.523) IC17.10 ; v2(-31.367,35.377) -31.345,35.398 -31.345,37.655 -31.22,37.78 R62.1 -29.32,37.78 -28.8,38.3 T13.1
SW10: IC17.11 R63.1 T14.1 | length 19.3
  Component Side w0.152: v2(-35.977,31.023) -35.977,31.823 v2@-31.9,35.9
  Solder Side w0.152: v2(-35.977,31.023) IC17.11 ; v2(-31.824,36.063) -31.824,39.238 -31.252,39.81 R63.1 -29.754,39.81 -29.411,39.466 -27.633,39.466 -27.379,39.72 -27.379,41.371 T14.1@-28.014,42.006 ; T14.1 -28.333,42.3 T14.1@-28.039,42.006
VCM: J31.33
pads on no net: FTG9.FTG2 FTG10.1 FTG11.1 FTG12.1 IC14.5 IC15.22 IC15.25 IC16.3 IC17.12 IC17.13 IC17.14 IC17.15 IC17.16 IC17.17 IC17.22 IC17.25 J31.20 J31.27 J31.28 J31.37 J31.38 J31.39 J31.40 J31.P1 J31.P2

## Polygon pours and split planes (outlines as drawn)
GND on Solder Side "Component Side-No Net" (solid, remove dead copper, pour order 2): -39.5,76.5 2.5,76.5 2.5,-2.5 -39.5,-2.5
GND on Component Side "Component Side-No Net" (solid, remove dead copper, pour order 0): -39.5,76.5 2.5,76.5 2.5,-2.5 -39.5,-2.5
GND on Ground Plane (split plane): 151 vertices, not listed, extent -39.49,-2.49 2.49,76.49
N6V0A on Power Plane (split plane): -34.565,65.673 -34.565,65.282 -34.56,65.257 -34.546,65.236 -33.765,64.455 -33.765,63.927 -33.927,63.765 -33.941,63.744 -33.946,63.719 -33.946,62.681 -33.941,62.656 -33.927,62.635 -33.146,61.854 -33.125,61.84 -33.1,61.835 -26.927,61.835 -24.765,59.673 -24.765,31.965 -28.973,31.965 -29.435,32.427 -29.435,34.773 -28.654,35.554 -28.64,35.575 -28.635,35.6 -28.635,59.2 -28.64,59.225 -28.654,59.246 -30.054,60.646 -30.075,60.66 -30.1,60.665 -33.373,60.665 -35.137,62.429 -35.137,64.302 -35.142,64.327 -35.156,64.348 -36.054,65.246 -36.075,65.26 -36.1,65.265 -37.773,65.265 -38.035,65.527 -38.035,66.073 -37.773,66.335 -35.227,66.335
P12V0A on Power Plane (split plane): -20.535,61.043 -20.535,19.57 -20.53,19.545 -20.516,19.524 -19.046,18.054 -19.025,18.04 -19,18.035 -11.927,18.035 -10.565,16.673 -10.565,13.527 -11.627,12.465 -23.673,12.465 -24.635,13.427 -24.635,59.7 -24.64,59.725 -24.654,59.746 -26.854,61.946 -26.875,61.96 -26.9,61.965 -33.073,61.965 -33.816,62.708 -33.816,63.692 -33.673,63.835 -23.327,63.835
N12V0A on Power Plane (split plane): -35.267,64.275 -35.267,62.402 -35.262,62.377 -35.248,62.356 -33.446,60.554 -33.425,60.54 -33.4,60.535 -30.127,60.535 -28.765,59.173 -28.765,35.627 -29.546,34.846 -29.56,34.825 -29.565,34.8 -29.565,32.4 -29.56,32.375 -29.546,32.354 -29.046,31.854 -29.025,31.84 -29,31.835 -24.765,31.835 -24.765,16.365 -30.273,16.365 -31.335,17.427 -31.335,56.6 -31.34,56.625 -31.354,56.646 -36.035,61.327 -36.035,62.411 -36.04,62.436 -36.054,62.457 -36.943,63.346 -36.964,63.36 -36.989,63.365 -37.773,63.365 -38.035,63.627 -38.035,64.873 -37.773,65.135 -36.127,65.135
P3V3 on Power Plane (split plane): 151 vertices, not listed, extent -39.49,-2.49 2.49,76.49

## Other copper
Component Side:
  rectangle net GND: -3.249,3.017 -1.395,4.389
  rectangle net GND: -3.046,8.834 -1.141,10.586
  rectangle net GND: -35.837,7.945 -32.992,8.91
  rectangle net GND: -35.786,14.041 -33.246,15.514
  rectangle net GND: -3.147,59.075 -0.962,60.246
  rectangle net GND: -9.853,68.448 -8.1,69.006
  rectangle net GND: -3.528,35.605 -1.319,37.496
  rectangle net GND: -2.969,41.727 -1.369,43.403
  rectangle net NetR77_2: -13.1,35.5 -10.3,39.9
  rectangle net NetR73_2: -16.711,26.284 -12.19,31.465
  rectangle net P3V3: -37.234,61.513 -36.218,62.504
  rectangle net P3V3: -38.275,61.513 -36.497,61.894
  region net GND: -33.754,54.3 -33.754,56.052 -34.77,56.052 -34.77,54.3
  rectangle net GND: -38.301,66.568 -34.415,66.974
  rectangle net GND: -38.275,64.663 -34.389,65.069
  rectangle net GND: -38.301,62.758 -34.415,63.164
  rectangle net P6V0A: -34.618,65.298 -31.849,66.339
  rectangle net N6V0A: -37.793,65.298 -36.396,66.314
  rectangle net N6V0A: -38.961,65.298 -37.183,65.704
  rectangle net N12V0A: -37.767,63.418 -36.269,64.434
  rectangle net N12V0A: -38.936,63.393 -37.158,63.799
  rectangle net P12V0A: -34.516,63.368 -32.738,63.774
  rectangle net P12V0A: -33.754,62.758 -32.256,63.774
Solder Side:
  rectangle net N12V0A: -29.614,15.743 -29.03,17.47
  rectangle net P3V3: -15.365,61.056 -14.349,62.606
  rectangle net P12V0A: -33.678,62.758 -31.087,63.749
  rectangle net N6V0A: -27.734,56.814 -26.922,57.754
  rectangle net P3V3: -17.041,58.897 -15.695,60.701
  region net P3V3: -13.743,60.167 -15.543,60.167 -15.543,58.237 -13.743,58.237
  region net P3V3: -13.769,61.488 -15.569,61.488 -15.569,59.913 -13.769,59.913
  region net GND: -20.957,42.616 -22.757,42.616 -22.757,41.041 -20.957,41.041
  rectangle net GND: -25.241,44.673 -23.441,46.248
  rectangle net GND: -25.368,48.356 -23.568,49.931
  rectangle net GND: -25.368,52.166 -23.568,53.741
  rectangle net P3V3: -33.246,40.381 -32.205,41.346
  rectangle net P3V3: -33.272,41.625 -32.23,42.717
  rectangle net GND: -25.931,18.41 -25.144,20.238
  rectangle net GND: -26.261,22.55 -22.705,23.49
  rectangle net GND: -27.76,29.865 -23.035,30.5
  rectangle net P12V0A: -23.514,12.818 -21.714,14.718
  rectangle net P12V0A: -23.514,14.596 -21.714,16.496
  region net P12V0A: -11.28,15.213 -13.08,15.213 -13.08,13.313 -11.28,13.313
  region net P12V0A: -11.28,17.067 -13.08,17.067 -13.08,15.167 -11.28,15.167
  region net N12V0A: -27.731,17.246 -27.731,19.046 -29.631,19.046 -29.631,17.246
  region net N6V0A: -28.398,57.064 -28.398,55.264 -26.498,55.264 -26.498,57.064
  rectangle net N6V0A: -29,32.3 -27.2,34.2
  rectangle net NetR77_2: -13.1,35.5 -11.4,39.9
  rectangle net NetR77_2: -15.5,36.7 -11.8,37.9
  rectangle net NetR73_2: -14.145,26.309 -12.19,35.199
  rectangle net NetR73_2: -15.695,34.234 -12.266,35.275
Ground Plane (plane layer: these items are gaps in the copper):
  rectangle: -13.9,26.7 -12.6,31.2
Power Plane (plane layer: these items are gaps in the copper):
  rectangle: -13.9,26.7 -12.6,31.2
  lines w0.127: -36.3,66.4 -35.2,66.4 -34.5,65.7 -34.5,65.282 -33.7,64.482 -33.7,63.9 ; -36.2,66.4 -37.8,66.4 -38.1,66.1 -38.1,65.5 -37.8,65.2 ; -24.7,16.3 -24.825,16.3 -30.3,16.3 -31.4,17.4 -31.4,56.6 -36.1,61.3 -36.1,62.411 -36.989,63.3 -37.8,63.3 -38.1,63.6 -38.1,64.9 -37.8,65.2 ; -24.7,31.9 -29,31.9 -29.5,32.4 -29.5,34.8 -28.7,35.6 -28.7,59.2 -30.1,60.6 -33.4,60.6 -35.202,62.402 -35.202,64.302 -36.1,65.2 -37.8,65.2 ; -33.7,63.9 -33.881,63.719 -33.881,62.681 -33.1,61.9 -26.9,61.9 -24.7,59.7 -24.7,13.4 -23.7,12.4 -11.6,12.4 -10.5,13.5 -10.5,16.7 -11.9,18.1 -19,18.1 -20.47,19.57 -20.47,61.07 -23.3,63.9 -33.7,63.9

## Silkscreen, mask and mechanical layers (free items; w line width, h text height)
Top Overlay:
  drawing of 1216 lines, arcs and shapes, not listed
  text "PCB mezzanine  / clock template rev1.0" at -30.201,75.438 h1.52 r270
  text "P" at -6.043,67.99 h2
  text "N" at -6,61 h2
  text "DAC /  CLK" at -6.782,52.451 h2
  text "P" at -6,44 h2
  text "N" at -6,37 h2
  text "MEZ CLK / IN" at 1.27,22.301 h2 r90
  text "N" at -35,17 h2 r270
  text "P" at -2,15 h2 r90
  text "RSVD" at -32,12 h2 r270
  text "REF IN" at -5.508,3.873 h2 r90
  text "P" at -35,3 h2 r270
  text "N" at -3,3 h2 r90
Bottom Overlay:
  drawing of 1222 lines, arcs and shapes, not listed
  text "DAC  / CLOCK IN" at -21.184,70.256 h1.52
  text "P3V3" at 0.406,45.568 h1.52
  text "N6V0" at 0.61,40.792 h1.52
  text "P6V0" at 0.66,35.408 h1.52
  text "N12V0" at 1.448,29.896 h1.52
  text "P12V0" at 1.6,21.844 h1.52
  text "PCB mezzanine clock template rev1.0" at -39.37,12.141 h1.52 r270
Mechanical 1:
  lines w0.05: -40,-3 -37,-3 3,-3 3,77 -40,77 -40,-3
Mechanical 8:
  lines w0.15: -39.573,0 -37,0 ; -39.573,74 -37,74 ; -37,-2.7 -37,0 ; -37,2.685 -37,0 ; -37,71.3 -37,74 ; -37,76.685 -37,74 ; -34.493,0 -37,0 ; -34.493,74 -37,74 ; -2.573,0 0,0 ; -2.573,74 0,74 ; 0,-2.7 0,0 ; 0,2.685 0,0 ; 0,71.3 0,74 ; 0,76.685 0,74 ; 2.507,0 0,0 ; 2.507,74 0,74
  text "P" at -6.043,67.99 h2
  text "DAC CLK" at -21,63 h2
  text "N" at -6,61 h2
  text "P" at -6,44 h2
  text "N" at -6,37 h2
  text "REF LO" at 1.118,24.079 h2 r90
  text "N" at -35,17 h2 r270
  text "P" at -2,15 h2 r90
  text "RSVD" at -32,12 h2 r270
  text "REF IN" at -5.69,3.912 h2 r90
  text "P" at -35,3 h2 r270
  text "N" at -3,3 h2 r90

## Text inside footprints (layer, text, board x,y; h text height)
J26: Drill Drawing "5.08" at -20.588,76.175 h0.75 r270; Drill Drawing "r0.4" at -18.206,75.381 h0.75 r270; Drill Drawing "4.25" at -20.111,76.969 h0.75; Mechanical 8 "PCB Edge" at -21.54,78.715 h0.75
SW4: Bottom Overlay "1" at -14.042,21.353 h1 r270; Bottom Overlay "2" at -14.042,23.639 h1 r270; Bottom Overlay "ON" at -9.597,20.591 h1 r270; Mechanical 14 "1" at -14.042,21.353 h1 r270; Mechanical 14 "2" at -14.042,23.639 h1 r270; Mechanical 14 "ON" at -9.597,20.591 h1 r270
SW7: Bottom Overlay "8" at -13.992,47.069 h1 r270; Bottom Overlay "7" at -13.992,44.529 h1 r270; Bottom Overlay "6" at -13.992,41.989 h1 r270; Bottom Overlay "5" at -13.992,39.449 h1 r270; Bottom Overlay "4" at -13.992,36.909 h1 r270; Bottom Overlay "3" at -13.992,34.369 h1 r270; Bottom Overlay "ON" at -9.547,28.781 h1 r270; Bottom Overlay "2" at -13.992,31.829 h1 r270; Bottom Overlay "1" at -13.992,29.543 h1 r270; Mechanical 14 "8" at -13.992,47.069 h1 r270; Mechanical 14 "7" at -13.992,44.529 h1 r270; Mechanical 14 "6" at -13.992,41.989 h1 r270; Mechanical 14 "5" at -13.992,39.449 h1 r270; Mechanical 14 "4" at -13.992,36.909 h1 r270; Mechanical 14 "3" at -13.992,34.369 h1 r270; Mechanical 14 "ON" at -9.547,28.781 h1 r270; Mechanical 14 "2" at -13.992,31.829 h1 r270; Mechanical 14 "1" at -13.992,29.543 h1 r270